# EAGLE board high level schematic (EAGLE 5.10)
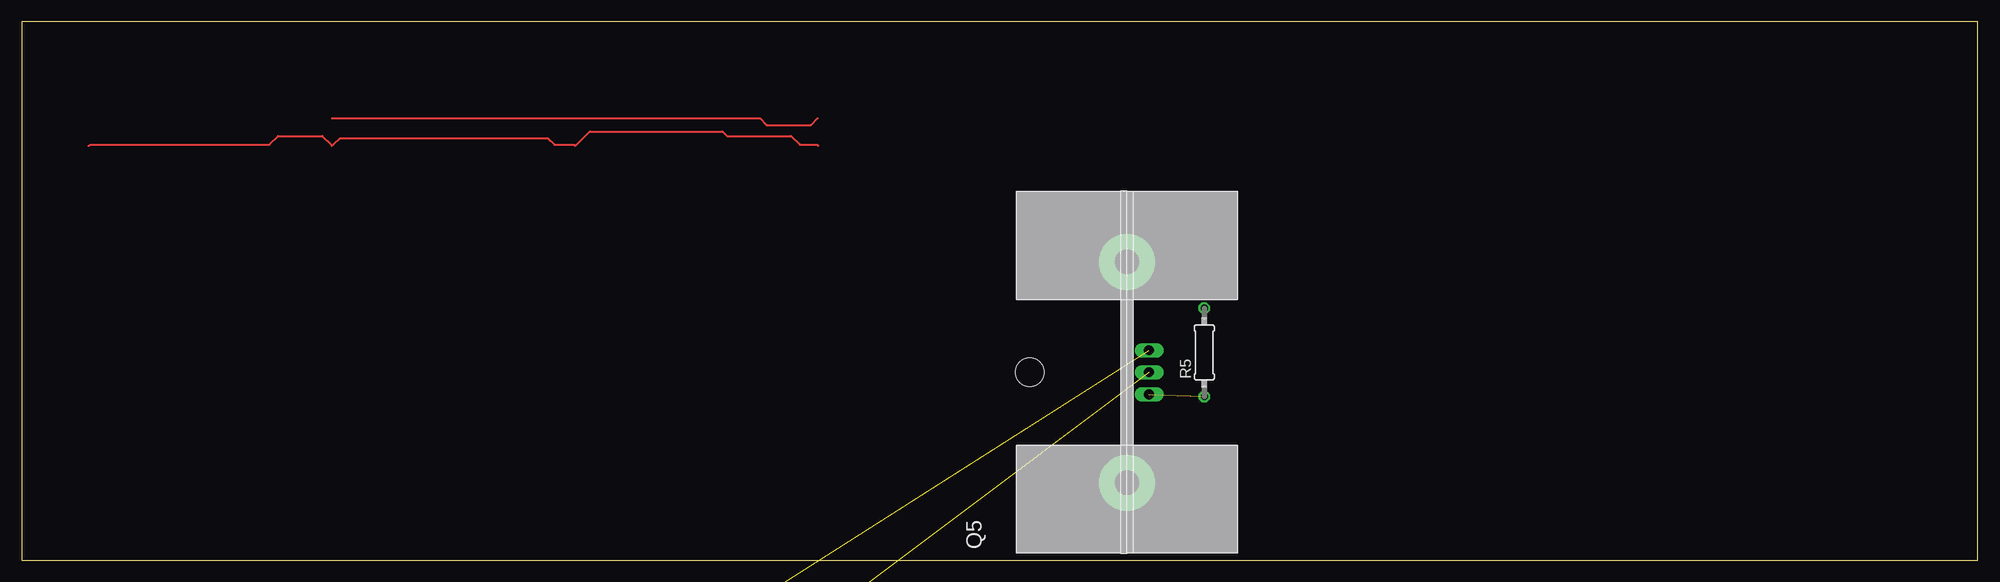
[diagram p0: board, top side]

Size 224.77 x 61.9 mm. Coordinates in mm from the lower left corner, seen from the top.
Outline: 0,0 224.77,0 224.77,61.9 0,61.9 0,0
Copper layers (1*16): Top 0.035mm / dielectric 1.5mm / Bottom 0.035mm
Design rules "default *": minimum track width 10mil, minimum drill 24mil, track to track 10mil, track to pad 10mil, pad to pad 10mil, via to via 10mil, smd to smd 10mil, copper to edge 40mil, drill to drill 10mil, minimum pad ring 10mil, minimum via ring 8mil, stop-mask expansion 4mil, vias tented up to drill 0mil, thermal gap 10mil

## Footprints (pad centres in the part's own frame; a part is rotated, then mirrored left to right if it is on the bottom)
TDKKPS55 = drill 1.1 square: +5V 51,12.5; ACL 4,5; ACN 4,22.5; GND 51,32.5
TDK-SWS1005 = drill 0.8 square: +5.5V 0,-1.27; GND 0,-3.81; LINE 0,5.08; NEUTRAL 0,2.54
TO92 = drill 0.813 octagon: 1 -1.27,0; 2 0,1.905; 3 1.27,0
BVS = smd 2.7 x 6.2: 1 -4.14,0; 2 4.14,0
TUXGR_16X2_R2 = drill 1 pad 1.676 round: 1 -32,15.5; 2 -29.46,15.5; 3 -26.92,15.5; 4 -24.38,15.5; 5 -21.84,15.5; 6 -19.3,15.5; 7 -16.76,15.5; 8 -14.22,15.5; 9 -11.68,15.5; 10 -9.14,15.5; 11 -6.6,15.5; 12 -4.06,15.5; 13 -1.52,15.5; 14 1.02,15.5; 15 3.56,15.5; 16 6.1,15.5 | hole 2.5: -37.5,-15.5; 37.5,-15.5; -37.5,15.5; 37.5,15.5
SL-160AA/PR = drill 1.321 pad 3.15 octagon: + 25.273,0; - -25.4,0
KS9V = drill 1.321 pad 2.54 long: 1 0,3.81; 2 0,-3.81
0204/7 = drill 0.813 octagon: 1 -3.81,0; 2 3.81,0
SOIC16R = smd 0.6 x 2.2: 1 -4.445,-4.775; 2 -3.175,-4.775; 3 -1.905,-4.775; 4 -0.635,-4.775; 5 0.635,-4.775; 6 1.905,-4.775; 7 3.175,-4.775; 8 4.445,-4.775; 9 4.445,4.8; 10 3.175,4.8; 11 1.905,4.8; 12 0.635,4.8; 13 -0.635,4.8; 14 -1.905,4.8; 15 -3.175,4.8; 16 -4.445,4.8
ARDUINO2009_1 = drill 1.016 long: 1 33.02,2.54; 2 35.56,2.54; 3 38.1,2.54; 4 40.64,2.54; 5 43.18,2.54; 6 45.72,2.54; 7 50.8,2.54; 8 53.34,2.54; 9 55.88,2.54; 10 58.42,2.54; 11 60.96,2.54; 12 63.5,2.54; 13 63.5,50.8; 14 60.96,50.8; 15 58.42,50.8; 16 55.88,50.8; 17 53.34,50.8; 18 50.8,50.8; 19 48.26,50.8; 20 45.72,50.8; 21 41.656,50.8; 22 39.116,50.8; 23 36.576,50.8; 24 34.036,50.8; 25 31.496,50.8; 26 28.956,50.8; 27 26.416,50.8; 28 23.876,50.8 | hole 3.2: 15.24,50.8; 66.04,35.56; 66.04,7.62 | hole 2: 55.17,27.114
AZ8 = drill 1.4 pad 2 round: 1 8.89,6.35; 2 -3.81,6.35; 3 -8.89,-1.27; 4 -3.81,-6.35; 5 -8.89,6.35
TO220-W/657-20ABP = drill 1.118 long: 1 -2.54,-2.54; 2 0,-2.54; 3 2.54,-2.54 | drill 2.8 pad 6.452 round: P$1 -12.7,0; P$2 12.7,0 | hole 3.302: 0,11.176
0207/10 = drill 0.813 octagon: 1 -5.08,0; 2 5.08,0
B3F-31XX = drill 1.016 octagon: 1 -2.261,-1.245; 2 2.261,-1.245 | drill 1.499 pad 2.159 round: 3 -3.505,1.245; 4 3.505,1.245
TO220BV = drill 1.016 long: G 2.54,-2.54; T1 -2.54,-2.54; T2 0,-2.54
USB = drill 1 round: 1 -3.5,12.99; 2 -1,12.99; 3 1,12.99; 4 3.5,12.99 | hole 2.3: -6.57,10.28; 6.57,10.28
6ESRM-P = drill 1.6 pad 2.6 round: 1 -9.1,9.7; 2 0,9.7; 3 9.1,9.7 | hole 3.6: -20,0; 20,0

## Placement (x,y rotation side)
5V_LOGIC_PSU  TDKKPS55  [TDKKPS55]  -33.02,-292.1 0 top  (outside the outline)
BATT_CHARGING_PSU  TDK-SWS1005  [TDK-SWS1005]  -46.99,-425.45 0 top  (outside the outline)
CHAMBER_TEMP_SENSE  AD590ZR  [TO92]  -31.75,-317.5 0 top  (outside the outline)
CHARGE_MOSFET_TEMP  AD590ZR  [TO92]  -45.72,-440.69 0 top  (outside the outline)
CHARGE_MOSFET_TEMP1  AD590ZR  [TO92]  -128.27,-452.12 0 top  (outside the outline)
COOLING_FAN  KK185  [KK185]  -24.13,-351.79 0 top  (outside the outline)
DAQ_R-SENSE  0.005  [BVS]  2.54,-92.46 0 top  (outside the outline)
DIS1  TUXGR_16X2_R2  [TUXGR_16X2_R2]  5.08,-381 0 top  (outside the outline)
DUT  SL-160AA/PR  [SL-160AA/PR]  -6.35,-304.8 0 top  (outside the outline)
FUSE_3A  [KS9V]  -27.94,-238.76 0 top  (outside the outline)
HEATER  [0204/7]  -29.21,-323.85 0 top  (outside the outline)
IC1  AD745R  [SOIC16R]  6.6,-67.31 0 top  (outside the outline)
IC3  [ARDUINO2009_1]  -20.83,-205.74 0 top  (outside the outline)
K1  AZ8-FORM-A  [AZ8]  -34.29,-419.1 0 top  (outside the outline)
LOAD_MOSFET_TEMP  AD590ZR  [TO92]  -45.72,-434.34 0 top  (outside the outline)
Q1  RFP12N10L  [TO220-W/657-20ABP]  20.57,-29.72 0 top  (outside the outline)
Q5  RFP12N10L  [TO220-W/657-20ABP]  127,21.59 90 top
R1  50  [0207/10]  5.84,-46.23 0 top  (outside the outline)
R2  0.05  [BVS]  4.83,-51.31 0 top  (outside the outline)
R3  0.05  [BVS]  4.83,-57.91 0 top  (outside the outline)
R5  50  [0207/10]  135.89,23.88 90 top
S1  [B3F-31XX]  -40.64,-392.43 0 top  (outside the outline)
S2  [B3F-31XX]  -40.64,-405.13 0 top  (outside the outline)
T2  TIC206D  [TO220BV]  -27.94,-247.65 0 top  (outside the outline)
X1  [USB]  -11.43,-95.5 0 top  (outside the outline)
X2  6ESRM-P  [6ESRM-P]  3.81,-219.71 0 top  (outside the outline)
X3  [USB]  -57.15,-441.96 0 top  (outside the outline)
X4  [USB]  -73.66,-443.23 0 top  (outside the outline)
X5  [USB]  -90.17,-444.5 0 top  (outside the outline)
X6  [USB]  -106.68,-445.77 0 top  (outside the outline)
X7  [USB]  -123.19,-447.04 0 top  (outside the outline)

## Library data of the parts
5V_LOGIC_PSU BATT_CHARGING_PSU Q1 Q5 = NEWPARTS
CHAMBER_TEMP_SENSE CHARGE_MOSFET_TEMP CHARGE_MOSFET_TEMP1 LOAD_MOSFET_TEMP = linear
COOLING_FAN = heatsink
DAQ_R-SENSE R2 R3 = resistor-shunt
DIS1 = display-lcd
DUT = battery
FUSE_3A = fuse
HEATER = resistor
IC1 = analog-devices
IC3 = arduino
K1 = relay
R1 R5 = rcl
S1 S2 = switch-omron
T2 = triac
X1 X3-X7 = con-amp
X2 = con-tycoelectronics

## Nets
+3V3: IC3.2
+5V: 5V_LOGIC_PSU.+5V DIS1.2 IC3.3
AGND: 5V_LOGIC_PSU.GND DAQ_R-SENSE.2 DIS1.1 IC3.4 IC3.5 IC3.27 R3.2 S1.2 S2.2
N$1: BATT_CHARGING_PSU.+5.5V DUT.+ IC1.3 Q5.2
N$2: Q5.3 R3.1
N$3: BATT_CHARGING_PSU.LINE K1.3
N$4: HEATER.2 T2.T1
N$5: DAQ_R-SENSE.1 DUT.- IC1.5
N$6: Q1.2
N$7: FUSE_3A.1 X2.3
N$8: BATT_CHARGING_PSU.GND Q1.3
N$9: 5V_LOGIC_PSU.ACL FUSE_3A.2 K1.1 T2.T2
N$10: Q1.1 R1.1
N$11: Q5.1 R5.1
N$12: IC3.11 S1.1
N$13: 5V_LOGIC_PSU.ACN BATT_CHARGING_PSU.NEUTRAL HEATER.1 X2.1
N$14: IC3.12 S2.1

## Tracks (layer width: path | path; a pad name or v marks a point on that pad's centre or on a via)
+5V  (2 unrouted)
AGND  (8 unrouted)
N$1  (3 unrouted)
N$2  (1 unrouted)
N$3  (1 unrouted)
N$4  (1 unrouted)
N$5  (2 unrouted)
N$7  (1 unrouted)
N$8  (1 unrouted)
N$9  (3 unrouted)
N$10  (1 unrouted)
N$11  (1 unrouted)
N$12  (1 unrouted)
N$13  (3 unrouted)
N$14  (1 unrouted)
NC
  Top 0.254: 91.5,47.62 91.44,47.75 89.41,47.75 88.39,48.77 81.03,48.77 80.52,49.28 65.28,49.28 63.75,47.75 63.56,47.62 63.5,47.75 61.21,47.75 60.45,48.51 36.58,48.51 35.81,47.75 35.62,47.62 35.56,47.75 34.54,48.77 29.46,48.77 28.45,47.75 7.87,47.75 7.68,47.62
NC2
  Top 0.254: 35.62,50.8 84.84,50.8 85.6,50.04 90.68,50.04 91.44,50.8 91.5,50.8